# Altium PCB Weapon_of_Aphelios.PcbDoc
Units mil, origin at the board's own origin, x right, y up, seen from the top; angles counter-clockwise.
Board outline 1771.65 x 1968.5 mil, 2 copper layers (Top Layer, Bottom Layer); 49 components, 28 nets, 186 pads, 53 vias.
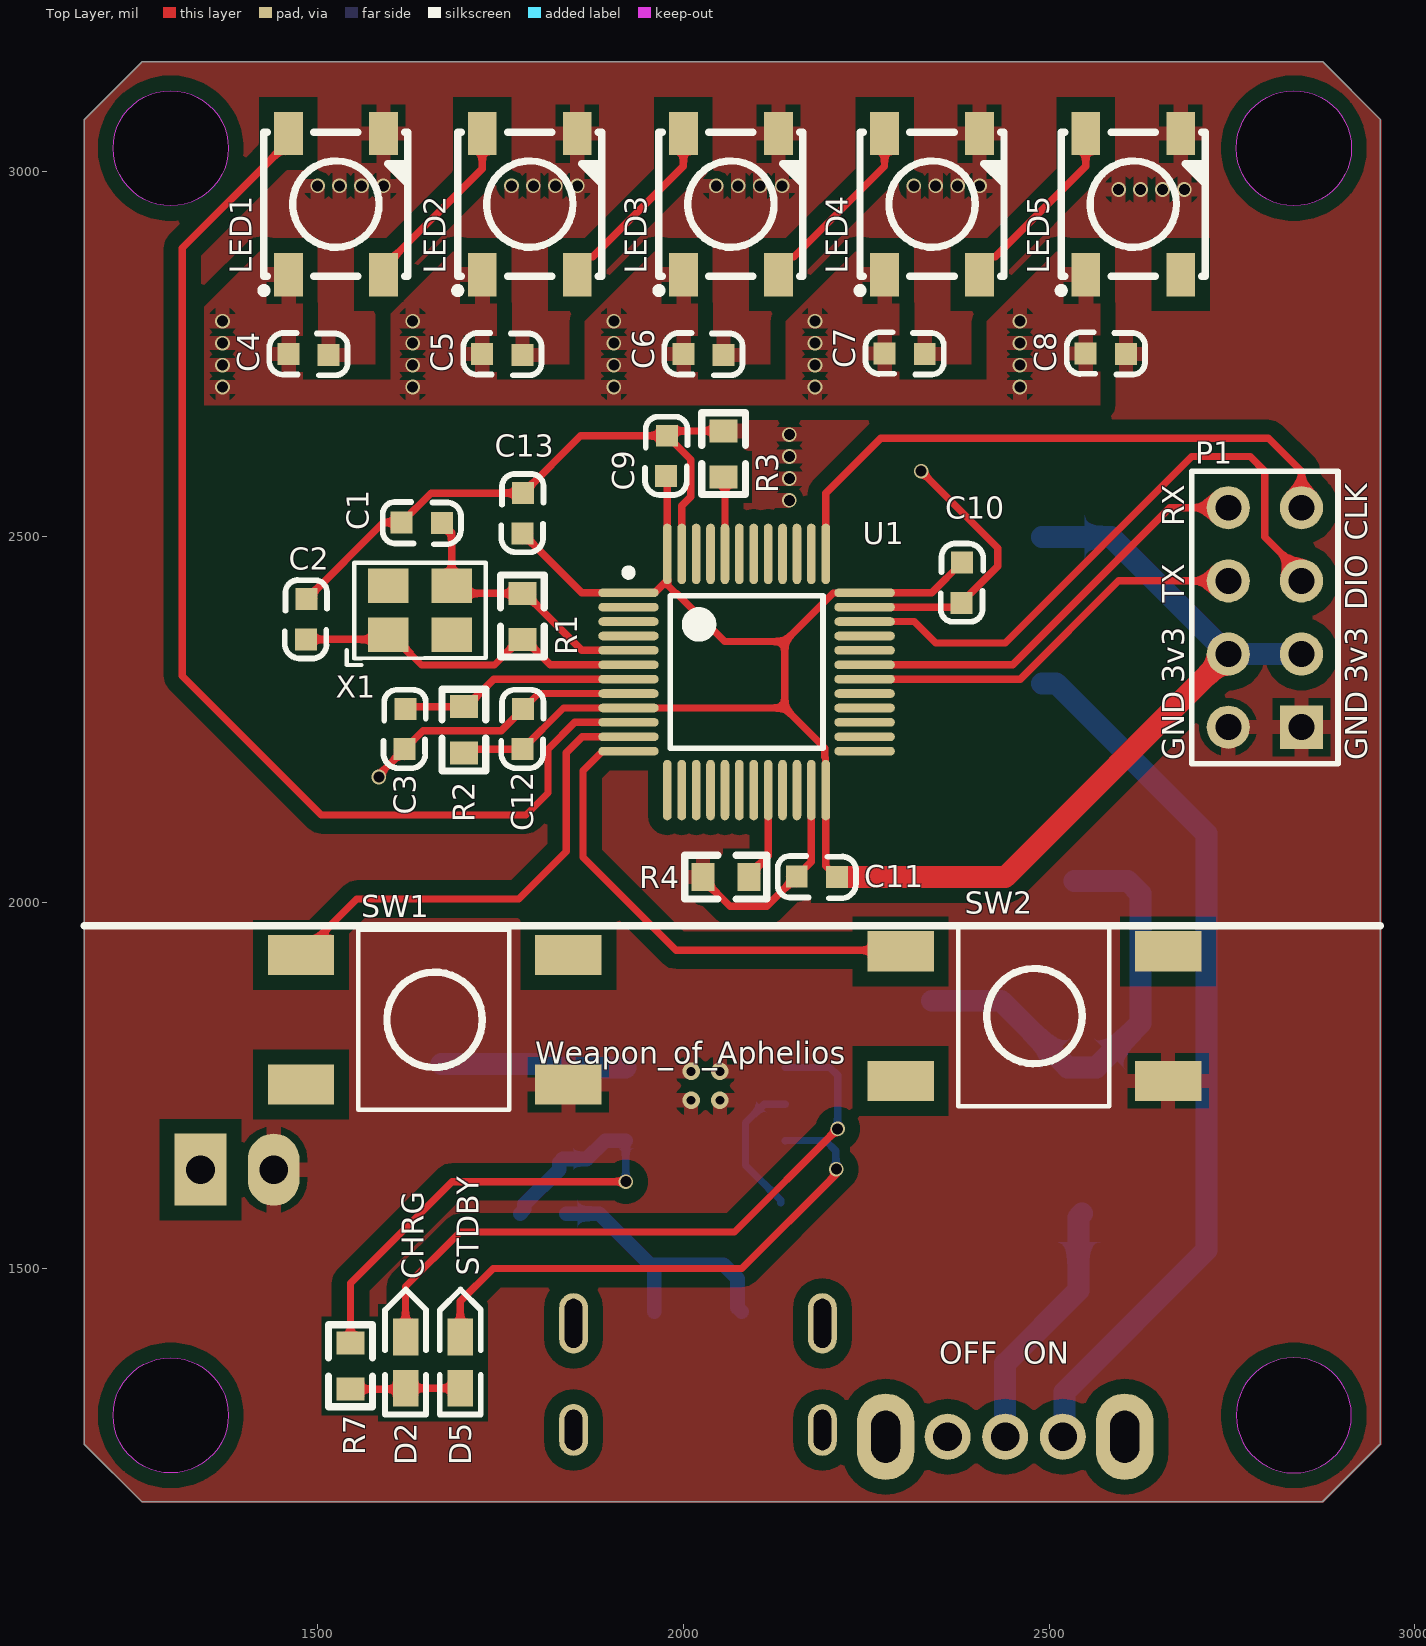
[diagram p0: Top Layer view]
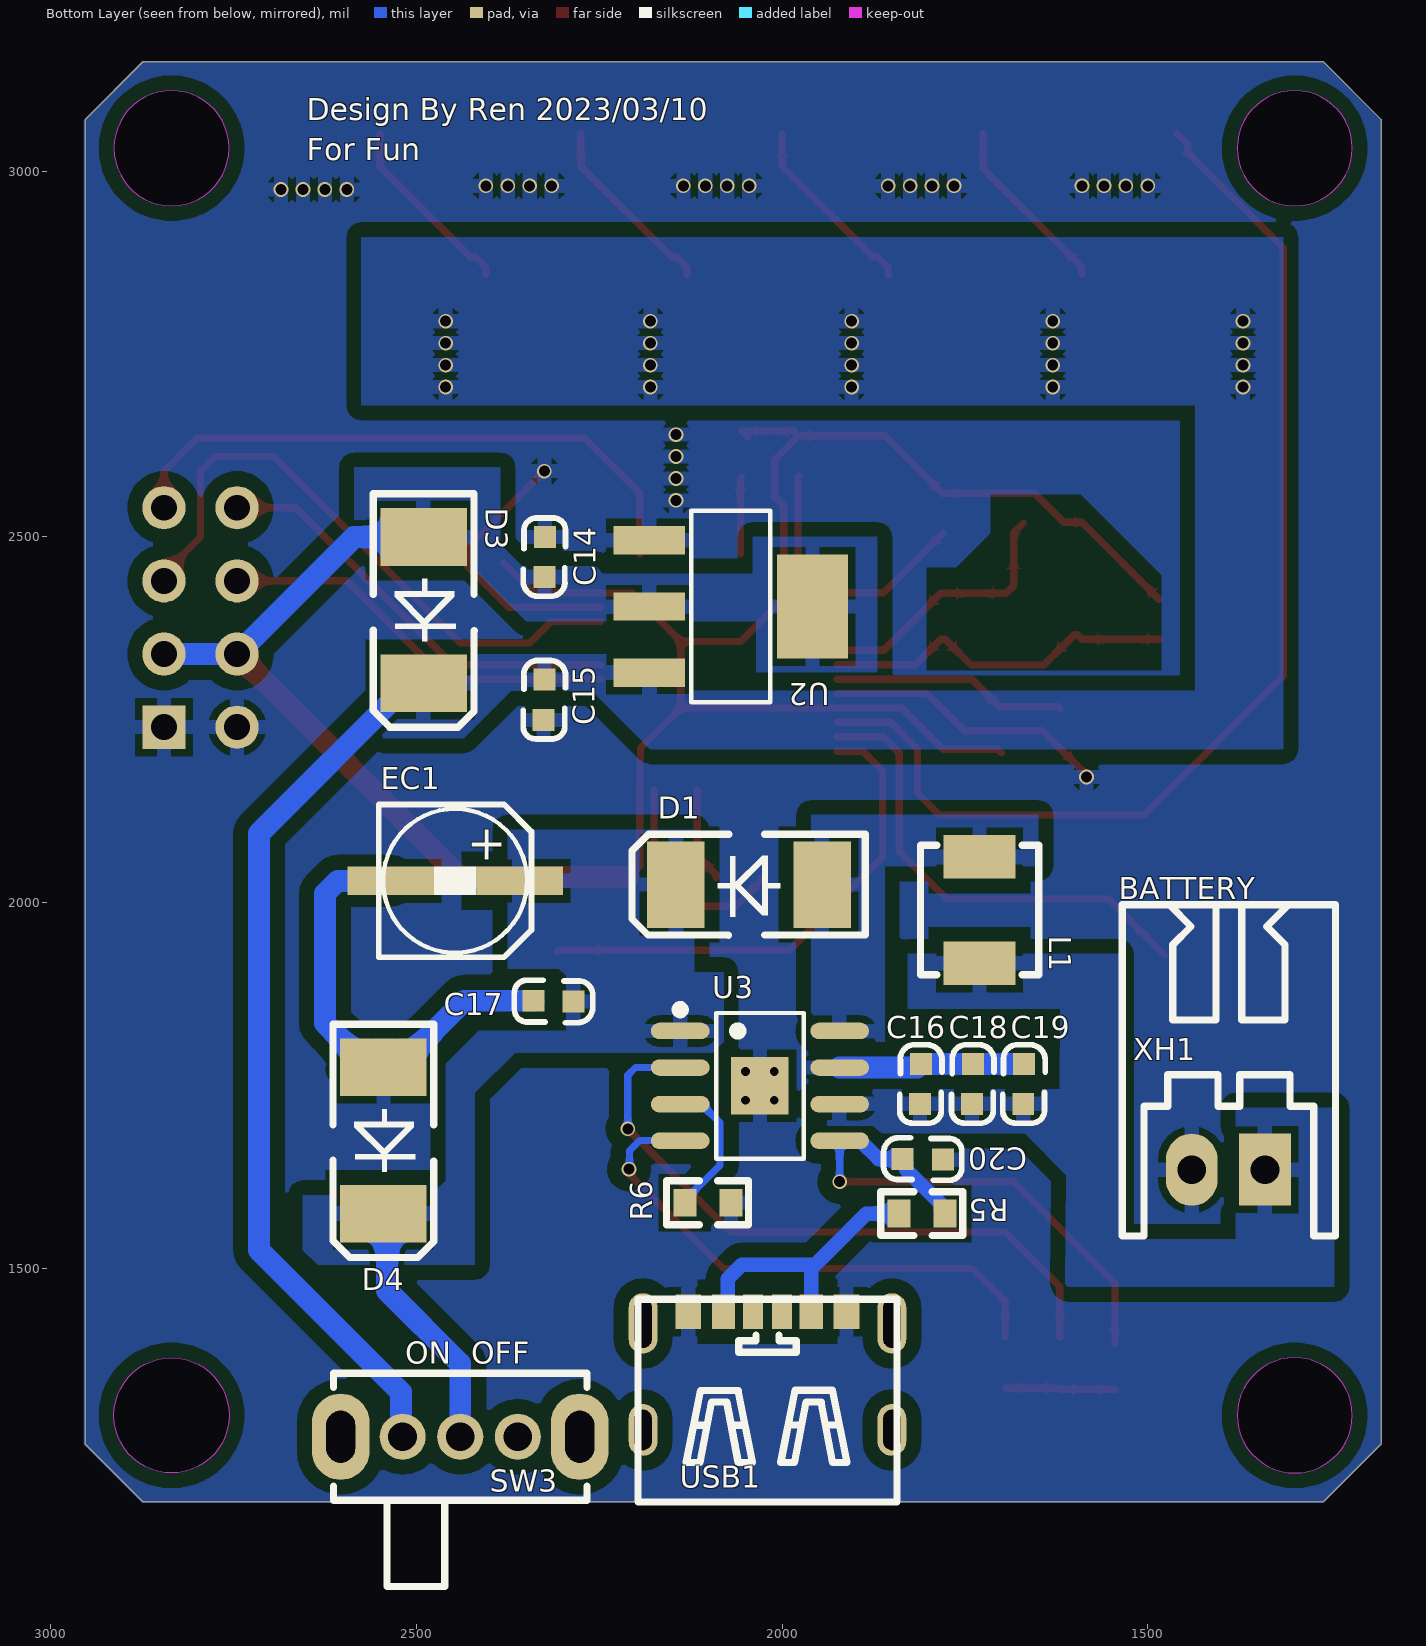
[diagram p1: Bottom Layer view, seen from below]
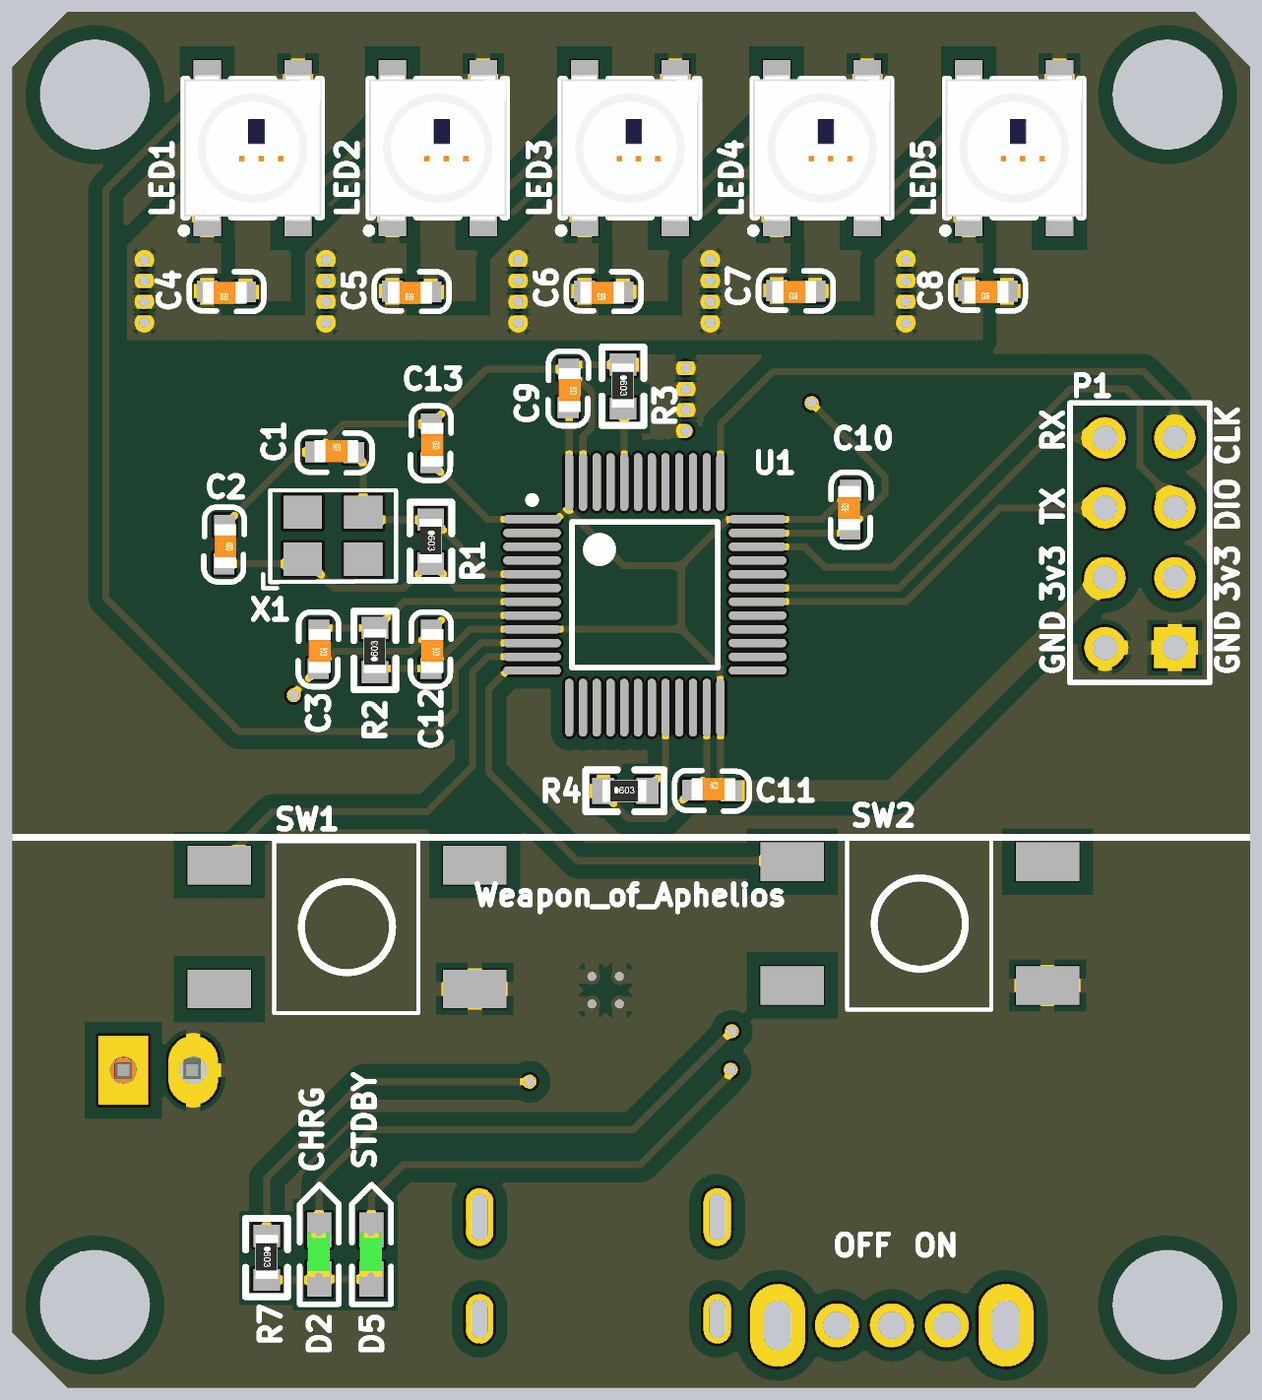
[diagram p2: 3D render of the assembled board from above, using the file's embedded part models]
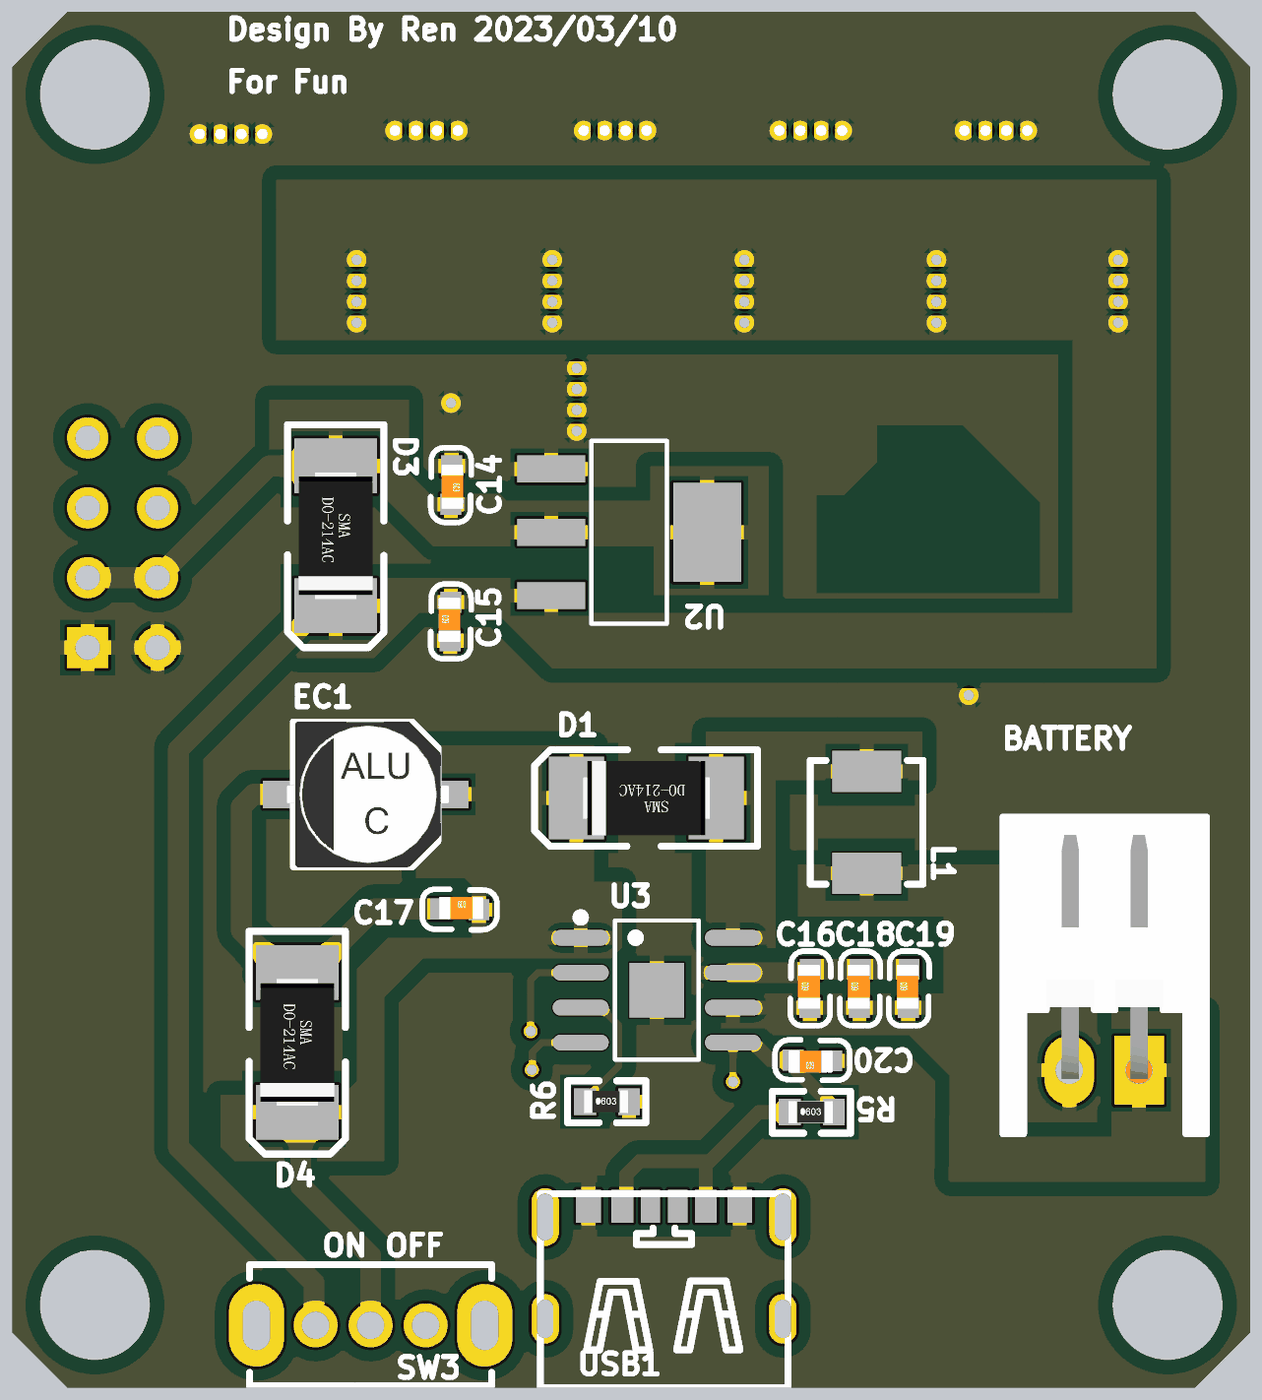
[diagram p3: 3D render of the assembled board from below, using the file's embedded part models]

## Layer stack, top to bottom
Top Solder: solder mask 0.4, Solder Resist, Dk 3.5
Top Layer: signal copper 1.4
Dielectric 1: dielectric 12.6, FR-4, Dk 4.8
Bottom Layer: signal copper 1.4
Bottom Solder: solder mask 0.4, Solder Resist, Dk 3.5

## Board outline
1259.84,1181.1 1181.1,1259.84 1181.1,3070.87 1259.84,3149.61 2874.02,3149.61 2952.76,3070.87 2952.76,1259.84 2874.02,1181.1
cut-out: 1299.21,1220.47 cw(c1299.21,1299.21) 1220.47,1299.21 cw(c1299.21,1299.21) 1299.21,1377.95 cw(c1299.21,1299.21) 1377.95,1299.21 cw(c1299.21,1299.21)
cut-out: 2755.91,1299.21 ccw(c2834.65,1299.21) 2834.65,1220.47 ccw(c2834.65,1299.21) 2913.39,1299.21 ccw(c2834.65,1299.21) 2834.65,1377.95 ccw(c2834.65,1299.21)
cut-out: 2834.65,2952.76 cw(c2834.65,3031.5) 2755.91,3031.5 cw(c2834.65,3031.5) 2834.65,3110.24 cw(c2834.65,3031.5) 2913.39,3031.5 cw(c2834.65,3031.5)
cut-out: 1299.21,2952.76 cw(c1299.21,3031.5) 1220.47,3031.5 cw(c1299.21,3031.5) 1299.21,3110.24 cw(c1299.21,3031.5) 1377.95,3031.5 cw(c1299.21,3031.5)

## Design rules (kind name [scope] priority, off if disabled: settings)
Clearance MCU [InComponent('U1') vs InComponent('U1')] p1: gap=8 ignorepadtopadclearanceinfootprint=TRUE except(0: Arc-Hole Track-Hole SMDPad-Hole THPad-Hole Via-Hole Fill-Hole Poly-Hole Region-Hole Text-Hole)
Clearance [All] p2: gap=8 ignorepadtopadclearanceinfootprint=TRUE except(0: Arc-Hole Track-Hole SMDPad-Hole THPad-Hole Via-Hole Fill-Hole Poly-Hole Region-Hole Text-Hole)
PlaneConnect [All] p1: planeconnectstyle=Relief reliefexpansion=20 reliefentries=4 reliefconductorwidth=20 reliefairgap=10
PolygonConnect [All] p1: connectstyle=Relief reliefconductorwidth=20 reliefentries=4 polygonreliefangle="90 Angle" airgapwidth=10
RoutingVias [All] p1: holewidth=15 width=20 viastyle="Through Hole" minholewidth=15 minwidth=20 maxholewidth=30 maxwidth=40
SolderMaskExpansion [All] p1: expansion=4 istentingtop=FALSE
Width [All] p1: maxlimit=30 minlimit=10 preferedwidth=20
29 further rules are at their usual default settings.

## Components (designator, comment, footprint, x,y, rotation, side; value= is the part's Value field where it differs from the comment)
C1 "22pF" 0603C 1614.79,2520.35 r0 top
C2 "22pF" 0603C 1485.35,2415.21 r270 top
C3 "100nF" 0603C 1620.35,2265.21 r270 top
C4 "100nF" 0603C 1515.21,2748.65 r180 top
C5 "100nF" 0603C 1780.21,2748.65 r180 top
C6 "100nF" 0603C 2055.21,2748.65 r180 top
C7 "100nF" 0603C 2330.21,2749.65 r180 top
C8 "100nF" 0603C 2605.21,2749.65 r180 top
C9 "100nF" 0603C 1977.93,2638.64 r270 top
C10 "100nF" 0603C 2379.65,2409.79 r90 top
C11 "100nF" 0603C 2154.79,2036.35 r0 top
C12 "100nF" 0603C 1781.35,2265.21 r270 top
C13 "100nF" 0603C 1781.35,2560.21 r270 top
C14 "10uF" 0603C 2323.65,2500.21 r270 bottom
C15 "10uF" 0603C 2326.35,2249.79 r90 bottom
C16 "0.1uF" 0603C 1811.65,1724.49 r90 bottom
C17 "100nF" 0603C 2340.21,1866.35 r180 bottom
C18 "22uF" 0603C 1740.65,1724.49 r90 bottom
C19 "22uF" 0603C 1670.65,1724.49 r90 bottom
C20 "10uF" 0603C 1780.09,1648.35 r0 bottom
D1 "SS34-MS" SMA/DO-214AC 1950.3,2024.7 r0 bottom
D2 "CHRG" LED-0603B 1620.56,1336.3 r90 top
D3 "SS34-MS" SMA/DO-214AC 2490,2495 r270 bottom
D4 "SMAJ6.0A" SMA/DO-214AC 2545,1770 r270 bottom
D5 "STDBY" LED-0603B 1695.3,1336.3 r90 top
EC1 "47uF" SMD-EC5.0X5.3X5.4 2358.75,2030 r0 bottom
L1 "10uH" IND-SMD_L4.5-W4.1_TMPA0402SP 1730,1990 r270 bottom
LED1 "WS2812B-B" LED-SMD_4P-L5.0-W5.0-TL_WS2812B-B 1525,2955 r90 top
LED2 "WS2812B-B" LED-SMD_4P-L5.0-W5.0-TL_WS2812B-B 1790,2955 r90 top
LED3 "WS2812B-B" LED-SMD_4P-L5.0-W5.0-TL_WS2812B-B 2065,2955 r90 top
LED4 "WS2812B-B" LED-SMD_4P-L5.0-W5.0-TL_WS2812B-B 2340,2955 r90 top
LED5 "WS2812B-B" LED-SMD_4P-L5.0-W5.0-TL_WS2812B-B 2615,2955 r90 top
P1 "Header 4X2" HDR2X4 2845,2240 r90 top
R1 "1M" 0603R 1780,2422.99 r270 top
R2 "10K" 0603R 1700,2205 r90 top
R3 "10K" 0603R 2055,2645 r270 top
R4 "10K" 0603R 2027.01,2035 r0 top
R5 "0.3" 0603R 1840,1575 r180 bottom
R6 "3k" 0603R 2132.99,1590 r180 bottom
R7 "1K" 0603R 1545,1397.99 r270 top
SW1 "TL3301EF100QG" KEY-SMD_4P-L6.0-W6.0-P4.50-LS10.0 1660,1840 r270 top
SW2 "TL3301EF100QG" KEY-SMD_4P-L6.0-W6.0-P4.50-LS10.0 2480,1845 r270 top
SW3 "SK12D07VG3_C431547" SW-TH_SK12D07VG3 2440,1270 r180 bottom
U1 "STM32F103C" LQFP-48_M 2086.42,2315.47 r0 top
U2 "AMS1117-3.3_C369933" SOT-223-4_L6.5-W3.5-P2.30-LS7.0-BR 2070,2405 r0 bottom
U3 "TP5400" SOIC-8_L5.0-W4.0-P1.27-LS6.0-BL-EP2.0 2030.3,1749.7 r270 bottom
USB1 "TYPE-C-31-M-16" TYPE-C-31-M-16 2020,1360 r180 bottom
X1 "8MHz" OSC-SMD_4P-L3.2-W2.5-BL 1640,2400 r0 top
XH1 "XH2" XH2/2.54mm/90 1340,1635 r0 bottom

## Footprints (in the part's own frame and the unit in brackets; to place one, negate y for a bottom-side part, rotate by r counter-clockwise, add the part's x,y. Pads: shape width x height; smd on the part's side, far side on the other; paste and mask are expansions set on the pad)
0603C [mil]
  rect 30x30 smd: 1(0.21,-0.35) 2(55.21,-1.35)
  silkscreen extent -26,-30 81,28, body extent -1,-15 62,17, height 12
0603R [mm]
  rect 0.8x0.965 smd: 1(0,0) 2(1.6,0)
  silkscreen extent -0.64,-0.76 2.21,0.76, body extent -0.04,-0.41 1.56,0.41, height 0.45
HDR2X4 [mm] "Connector; Header; 4x2 Position"
  rect 1.5x1.5 hole 0.9: 1(0,0)
  round 1.5 hole 0.9: 2(0,2.54) 3(2.54,0) 4(2.54,2.54) 5(5.08,0) 6(5.08,2.54) 7(7.62,0) 8(7.62,2.54)
  silkscreen extent -1.27,-1.27 8.89,3.81
IND-SMD_L4.5-W4.1_TMPA0402SP [mm]
  rect 1.5x2.5 smd mask+0.051: 1(-1.85,0) 2(1.85,0)
  silkscreen extent -2.25,-2.05 2.25,2.05
KEY-SMD_4P-L6.0-W6.0-P4.50-LS10.0 [mm]
  rect 1.4x2.3 smd mask+0.051: 1(-2.25,-4.643) 2(-2.25,4.643) 3(2.25,4.643) 4(2.25,-4.643)
  silkscreen extent -3.13,-2.65 3.13,2.6
LED-0603B [mil]
  rect 50x35 smd: A(0,0.26) K(70,0.26)
  silkscreen extent -36,-28 135,28, body extent 4,-15 66,17, height 24
LED-SMD_4P-L5.0-W5.0-TL_WS2812B-B [mm]
  rect 1.5x1 smd mask+0.051: 1(-2.45,1.65) 2(-2.45,-1.65) 3(2.45,-1.65) 4(2.45,1.65)
  silkscreen extent -3.1,-2.5 2.5,2.6, body extent -2.7,-2.5 2.7,2.5, height 1.57
LQFP-48_M [mm] "Thin QFP, 48-Leads, Body 7x7mm, Pitch 0.5mm, IPC Low Density"
  oval 2.1x0.3 smd: 1(-4.1,2.75) 2(-4.1,2.25) 3(-4.1,1.75) 4(-4.1,1.25) 5(-4.1,0.75) 6(-4.1,0.25) 7(-4.1,-0.25) 8(-4.1,-0.75) 9(-4.1,-1.25) 10(-4.1,-1.75) 11(-4.1,-2.25) 12(-4.1,-2.75) 25(4.1,-2.75) 26(4.1,-2.25) 27(4.1,-1.75) 28(4.1,-1.25) 29(4.1,-0.75) 30(4.1,-0.25) 31(4.1,0.25) 32(4.1,0.75) 33(4.1,1.25) 34(4.1,1.75) 35(4.1,2.25) 36(4.1,2.75)
  oval 0.3x2.1 smd: 13(-2.75,-4.1) 14(-2.25,-4.1) 15(-1.75,-4.1) 16(-1.25,-4.1) 17(-0.75,-4.1) 18(-0.25,-4.1) 19(0.25,-4.1) 20(0.75,-4.1) 21(1.25,-4.1) 22(1.75,-4.1) 23(2.25,-4.1) 24(2.75,-4.1) 37(2.75,4.1) 38(2.25,4.1) 39(1.75,4.1) 40(1.25,4.1) 41(0.75,4.1) 42(0.25,4.1) 43(-0.25,4.1) 44(-0.75,4.1) 45(-1.25,4.1) 46(-1.75,4.1) 47(-2.25,4.1) 48(-2.75,4.1)
  silkscreen extent -4.22,-2.65 2.65,3.57, body extent -3.5,-3.5 3.5,3.5, height 1.6
OSC-SMD_4P-L3.2-W2.5-BL [mm]
  rect 1.4x1.2 smd: 1(-1.1,-0.851) 2(1.1,-0.851) 3(1.1,0.851) 4(-1.1,0.851)
  silkscreen extent -2.54,-1.91 2.29,1.65
SMA/DO-214AC [mm] "塑封二极管"
  rect 2x3 smd: A(-0.127,0) K(4.953,0)
  silkscreen extent -1.63,-1.75 6.48,1.75, body extent 0.11,-1.35 4.71,1.35, height 2.4
SMD-EC5.0X5.3X5.4 [mm]
  rect 3x1 smd: 1(0,0) 2(4.477,0)
  silkscreen extent -0.41,-2.65 4.89,2.66, body extent -0.79,-2.65 5.11,2.65, height 5.41
SOIC-8_L5.0-W4.0-P1.27-LS6.0-BL-EP2.0 [mil]
  oval 22.6x80.2 smd mask+2: 1(-75,-109) 2(-25,-109) 3(25,-109) 4(75,-109) 5(75,109) 6(25,109) 7(-25,109) 8(-75,109)
  rect 78.7x78.7 smd mask+2: 9(0,0)
  silkscreen extent -110,-115 100,60
SOT-223-4_L6.5-W3.5-P2.30-LS7.0-BR [mm]
  rect 2.47x0.98 smd: 1(2.835,-2.3) 2(2.835,0) 3(2.835,2.3)
  rect 2.47x3.6 smd: 4(-2.835,0)
  silkscreen extent -1.37,-3.33 1.37,3.33
SW-TH_SK12D07VG3 [mm]
  round 1.6 hole 1: 1(-2,0) 2(0,0) 3(2,0)
  oval 2x3 hole 1 slot 1.8 at 90 deg: 4(4.15,0) 5(-4.15,0)
  silkscreen extent -4.4,-5.2 4.4,2.2
TYPE-C-31-M-16 [mm]
  oval 1x2.1 hole 0.6 slot 1.7 at 90 deg: 1(-4.32,1.65) 2(4.32,1.65)
  oval 1x1.8 hole 0.6 slot 1.4 at 90 deg: 3(-4.32,-2.05) 4(4.32,-2.05)
  rect 0.7x1.2 smd: A5(-0.5,2.05) B5(0.5,2.05)
  rect 0.8x1.2 smd: A9(1.52,2.05) B9(-1.52,2.05)
  rect 0.9x1.2 smd: A12(2.75,2.05) B12(-2.75,2.05)
  silkscreen extent -4.5,-4.55 4.5,2.49
XH2/2.54mm/90 [mm]
  rect 1.8x2.5 hole 1: 1(0,0)
  oval 1.8x2.5 hole 1: 2(2.54,0)
  silkscreen extent -2.45,-9.2 4.95,2.3, body extent -2.45,-9.2 4.95,2.3, height 6.1

## Part data
C1 C2: library part CAP
C3 C4 C5 C6 C7 C8 C9 C10 C11 C12 C13 C14 C15 C16 C17 C18 C19 C20: library part CAP, "无极性电容"
D1 D3: library part "DIODE SCHOTTKY", "肖特基二极管"
D2 D5: library part LED
D4: library part "DIODE ZENER", "瞬态二极管 SMAJ6.0A DO-214AC 6.0V"
EC1: library part SMD_ECAP, "贴片电解电容"
L1: library part TMPC0402HP-100MG-Z02, DC Resistance (DCR)=215mΩ, JLCPCB Part Class="Extended Part", LCSC Part Name="10uH ±20% 1.4A 215mΩ", Manufacturer=台庆, Rated Current=1.4A, Tolerance=±20%, Add into BOM=yes, Convert to PCB=yes, Datasheet=https://atta.szlcsc.com/upload/public/pdf/source/20200917/C305203_F071C71654DE86DE842DF29DC4BB6A78.pdf, Device=TMPC0402HP-100MG-Z02, Manufacturer Part=TMPC0402HP-100MG-Z02, Name=10uH, Supplier=LCSC, Supplier Footprint=SMD, Supplier Part=C305203, Symbol=TMPC0402HP-100MG-Z02
LED1 LED2 LED3 LED4 LED5: Emitted Color=RGB三色, JLCPCB Part Class="Extended Part", LCSC Part Name="RGB三色 （注意防潮，请查阅规格书中对应具体内容）", Manufacturer=worldsemi, Add into BOM=yes, Convert to PCB=yes, Datasheet=https://atta.szlcsc.com/upload/public/pdf/source/20200615/C114586_26EB6813EC9F2A3F6C7FBB2AD75DE01F.pdf, Device=WS2812B-B, Manufacturer Part=WS2812B-B, Name=WS2812B-B, Supplier=LCSC, Supplier Footprint=5050(mm), Supplier Part=C114586, Symbol=WS2812B-B
P1: "Header, 4-Pin, Dual row", LatestRevisionDate=17-Jul-2002, LatestRevisionNote="Re-released for DXP Platform.", Publisher="Altium Limited"
R1 R2 R3 R4 R5 R6 R7: library part RES
SW1 SW2: Contact Current=50mA, JLCPCB Part Class="Extended Part", Manufacturer=E-Switch, Voltage Rating (DC)=12V, Actuator Style=圆形按钮, Add into BOM=yes, Circuit=单刀单掷, Convert to PCB=yes, Datasheet=https://atta.szlcsc.com/upload/public/pdf/source/20181030/C273499_C7AAC60B73C66F9CC8848B3DA9BBFF04.pdf, Device=TL3301EF100QG, LCSC Part Name=TL3301EF100QG, Manufacturer Part=TL3301EF100QG, Mounting Style=立贴, Name=TL3301EF100QG, Supplier=LCSC, Supplier Footprint=SMD,6x6mm, Supplier Part=C273499, Switch Height=3.7mm, Switch Length=6mm, Switch Width=6mm, Symbol=TL3301EF100QG, With Lamp=-
SW3: BOM_JLCPCB Part Class="Extended Part", BOM_Manufacturer="SHOU HAN", BOM_Manufacturer Part=SK12D07VG3, BOM_Supplier=LCSC, BOM_Supplier Part=C431547, Contributor=LCSC, spicePre=S, spiceSymbolName=SK12D07VG3_C431547
U1: "STM32单片机48引脚"
U2: BOM_Manufacturer=KEXIN, BOM_Manufacturer Part=AMS1117-3.3, BOM_Assembly Type=smtWeld, BOM_Paste Type=expand, BOM_Supplier=LCSC, BOM_Supplier Part=C369933, Contributor=LCSC, spicePre=U, spiceSymbolName=AMS1117-3.3_C369933
U3: Battery Pack Voltage=-, JLCPCB Part Class="Extended Part", Manufacturer=TOPPOWER(南京拓微), Add into BOM=yes, Battery Chemistry=-, Charge Current - Max=-, Convert to PCB=yes, Datasheet=https://atta.szlcsc.com/upload/public/pdf/source/20131206/1457706662490.pdf, Device=TP5400, Interface=-, LCSC Part Name=TP5400, Manufacturer Part=TP5400, Name=TP5400, Number of Cells=-, Supplier=LCSC, Supplier Footprint=SOIC-8_EP_150mil, Supplier Part=C24154, Symbol=TP5400, Voltage - Supply (Max)=-
X1: library part "8MHz 10pF ±10ppm", BOM_Manufacturer="Zhejiang Abel Elec", BOM_Manufacturer Part=TAXM8M4RDBCCT2T, BOM_Assembly Type=smtWeld, BOM_Paste Type=expand, BOM_Supplier=LCSC, BOM_Supplier Part=C400090, Contributor=LCSC, nameAlias=Frequency, spicePre=X, spiceSymbolName=TAXM8M4RDBCCT2T

## Via types
v1: diameter 20, hole 15, Top Layer to Bottom Layer, 49 vias
v2: diameter 24, hole 12, Top Layer to Bottom Layer, 4 vias

## Nets (pads, with @x,y where several pads share a name; then routed paths per layer and width w, separated by ;. In a path a pad name is that pad's centre, name@x,y a point inside that pad or via, vN(x,y) a via of type N, cw(c..) or ccw(c..) an arc to the next point about the centre after c; other vN are vias at no path point)
3v3: C9.2 C10.2 C11.2 C12.2 C13.2 C14.2 D3.A P1.3 P1.4 R2.1 U1.1 U1.9 U1.24 U1.36 U1.48 U2.2 U2.4 | length 2766.3
  Top Layer w10: R2.1 1705,2210 C12.2 1836.26,2266.26 U1.9 2138.74,2266.26 ; C13.2 1861.26,2423.74 U1.1 1960.78,2423.74 1978.5,2441.46 1978.5,2434.06 ; C9.2 1978.15,2581.85 U1.48 U1.48@1978.15,2441.46 ; 1978.93,2433.63 1990,2422.55 1991.23,2422.55 2056.65,2357.13 2138.74,2357.13 ; C11.2 2194.68,2050.32 U1.24 2194.34,2154.4 2194.34,2198.53 2193.5,2199.37 2193.5,2211.5 2138.74,2266.26 ; C10.2 2339.74,2423.74 U1.36 2247.49,2423.39 2205,2423.39 2138.74,2357.13 ; 2138.74,2266.26 2138.74,2357.13
  Top Layer w30: C11.2 2440,2035 P1.4
  Bottom Layer w30: D3.A 2585,2500 P1.4 P1.3
5V: C4.2 C5.2 C6.2 C7.2 C8.2 C15.2 D3.K LED1.1 LED2.1 LED3.1 LED4.1 LED5.1 SW3.1 U2.3 | length 1216
  Bottom Layer w30: D3.K 2509.68,2300 2715,2094.68 2715,1525 2520.96,1330.96 2520.96,1272.22 SW3.1
  other v1: 1370,2705 1630,2705 1905,2705 2180,2705 2460,2705 1370,2735 1630,2735 1905,2735 2180,2735 2460,2735 1370,2765 1630,2765 1905,2765 2180,2765 2460,2765 1370,2795 1630,2795 1905,2795 2180,2795 2460,2795
BAT: C16.1 C18.1 C19.1 L1.2 U3.6 XH1.1
DIN: LED1.4 U1.10 | length 1577.8
  Top Layer w10: LED1.4 1445.36,3036.77 1445.36,3025.36 1315,2895 1315,2310 1505,2120 1785,2120 1815,2150 1815,2210 1851.57,2246.57 U1.10
GND: C1.1 C2.1 C3.2 C4.1 C5.1 C6.1 C7.1 C8.1 C9.1 C10.1 C11.1 C12.1 C13.1 C14.1 C15.1 C16.2 C17.1 C18.2 C19.2 C20.1 D4.A EC1.2 LED1.3 LED2.3 LED3.3 LED4.3 LED5.3 P1.1 P1.2 R3.1 R4.1 R6.2 SW1.3 SW2.3 U1.8 U1.23 U1.35 U1.47 U2.1 U3.7 U3.9 USB1.A12 USB1.B12 XH1.2 | length 2791.5
  Top Layer w10: C2.1 1590,2520 C1.1 1655,2560 C13.1 1859.43,2638.43 C9.1 ; v1(1583.83,2171.83) 1585.74,2173.74 1585.74,2176.74 C3.2 1644,2235 1751,2235 C12.1 1801.94,2285.94 U1.8 ; U1.47 1997.83,2542.83 2010,2555 2010,2606 C9.1 ; R4.1 2027.01,2031.75 2063.76,1995 2114,1995 C11.1 2175,2056 U1.23 ; R3.1@2047.01,2637.01 R3.1 1984.15,2645 C9.1 ; U1.35 2374.06,2404.06 C10.1 2430,2460 2430,2485 v1(2325,2590)
  Bottom Layer w30: C19.2 C18.2 C16.2 1815.3,1774.7 U3.7 ; C17.1 2434.32,1866 2525.32,1775 D4.A 2564.68,1775 2625,1835.32 2625,2012.43 2607.43,2030 EC1.2
  other v1: 2145,2550 2145,2580 2145,2610 2145,2640 2595,2975 2625,2975 2655,2975 2685,2975 1500,2980 1530,2980 1560,2980 1590,2980 1765,2980 1795,2980 1825,2980 1855,2980 2045,2980 2075,2980 2105,2980 2135,2980 2315,2980 2345,2980 2375,2980 2405,2980
  other v2: 2010.6,1730 2050,1730 2010.6,1769.4 2050,1769.4
KEY1: SW1.1 U1.11 | length 650.4
  Top Layer w10: SW1.1 1553.62,2005 1775,2005 1840,2070 1840,2205 1861.89,2226.89 U1.11
KEY2: SW2.1 U1.12 | length 689.2
  Top Layer w10: U1.12 1889.57,2207.2 1862.82,2180.46 1862.82,2062.18 1990,1935 2305.78,1935 SW2.1@2307.2,1933.58
NetC1_2: C1.2 R1.1 U1.5 X1.3 | length 369.4
  Top Layer w10: C1.2 1683.3,2505.7 X1.3 1693.82,2422.99 R1.1 1783.25,2422.99 1861.24,2345 U1.5
NetC2_2: C2.2 R1.2 U1.6 X1.1 | length 489.7
  Top Layer w10: C2.2 1590.19,2360 X1.1 1600.63,2366.5 1642.13,2325 1741.75,2325 1776.75,2360 R1.2 1783.25,2360 1817.93,2325.32 U1.6
NetC3_1: C3.1 R2.2 U1.7 | length 321.8
  Top Layer w10: C3.1 1622.99,2267.99 R2.2 1703.25,2267.99 1740.89,2305.63 U1.7
NetC20_2: C20.2 R5.2 R7.1 U3.5 | length 767
  Top Layer w10: R7.1 1545,1480 1683.7,1618.7 v1(1921.3,1618.7)
  Bottom Layer w10: v1(1921.3,1618.7) U3.5
  Bottom Layer w20: R5.2 1782.76,1580.75 1782.76,1587.76 1830.3,1635.3 1830.3,1644.7 C20.2 1868.2,1649.7 1892,1673.5 1893.2,1674.7 U3.5
NetD1_A: D1.A L1.1 U3.8
NetD2_A: D2.A D5.A R7.2 | length 150.6
  Top Layer w10: R7.2 1619,1335 D2.A D5.A
NetD2_K: D2.K U3.2 | length 898.1
  Top Layer w10: D2.K 1620.3,1475.3 1695,1550 2070,1550 v1(2210.89,1690.89)
  Bottom Layer w10: U3.2 2200.3,1774.7 2210.89,1764.11 v1(2210.89,1690.89)
NetD5_K: D5.K U3.4 | length 742
  Top Layer w10: D5.K 1695.04,1455.04 1740,1500 2080,1500 2206.29,1626.29 2206.29,1630.08 2209.25,1633.04 v1(2209.25,1635.75)
  Bottom Layer w10: U3.4 2139.45,1674.85 2194.4,1674.85 2208.5,1660.75 2208.5,1636.5 v1(2209.25,1635.75)
NetLED1_2: LED1.2 LED2.4 | length 248.9
  Top Layer w10: LED1.2 LED1.2 1589.96,2868.39 1725.04,3003.47 LED2.4
NetLED2_2: LED2.2 LED3.4 | length 256.9
  Top Layer w10: LED2.2 LED2.2 1854.96,2868.39 1869.64,2883.07 1876.18,2883.07 2000.04,3006.93 LED3.4
NetLED3_2: LED3.2 LED4.4 | length 256.9
  Top Layer w10: LED3.2 LED3.2 2129.96,2868.39 2144.64,2883.07 2151.18,2883.07 2275.04,3006.93 LED4.4
NetLED4_2: LED4.2 LED5.4 | length 256.8
  Top Layer w10: LED4.2 2404.96,2868.39 2419.64,2883.07 2426.18,2883.07 2550.04,3006.93 LED5.4
NetR3_2: R3.2 U1.44 | length 105.9
  Top Layer w10: R3.2 2056.89,2580.12 U1.44
NetR4_2: R4.2 U1.20 | length 129.8
  Top Layer w10: R4.2 2090,2038.25 2115.94,2064.19 U1.20
NetR6_1: R6.1 U3.3 | length 193.9
  Bottom Layer w10: R6.1 2132.99,1593.25 2085,1641.24 2085,1699.2 2110.5,1724.7 U3.3
SWCLK: P1.7 U1.37 | length 832.9
  Top Layer w10: U1.37 2194.68,2559.68 2270,2635 2800,2635 2845,2590 P1.7
SWDIO: P1.5 U1.34 | length 844
  Top Layer w10: U1.34 2315.63,2384.37 2345,2355 2440,2355 2695,2610 2775,2610 2795,2590 2795,2500 2845,2450 P1.5
USART1_RX: P1.8 U1.31 | length 586.1
  Top Layer w10: U1.31 2450.32,2325.32 2665,2540 P1.8
USART1_TX: P1.6 U1.30 | length 552.8
  Top Layer w10: U1.30 2460.63,2305.63 2595,2440 P1.6
VCC: R5.1 USB1.A9 USB1.B9 | length 385
  Bottom Layer w20: R5.1 1885,1575 1955,1505 ; USB1.A9 1960.15,1499.85 1955,1505 ; USB1.B9 2074.1,1446.46 2074.1,1485.9 2055,1505 1955,1505
VOUT: C17.2 D1.K D4.K EC1.1 SW3.2 U3.1 | length 340
  Bottom Layer w30: SW3.2@2440,1278.54 2440,1370 2540,1470 2540,1570 D4.K
pads on no net: LED5.2 SW1.2 SW1.4 SW2.2 SW2.4 SW3.3 SW3.4 SW3.5 U1.2 U1.3 U1.4 U1.13 U1.14 U1.15 U1.16 U1.17 U1.18 U1.19 U1.21 U1.22 U1.25 U1.26 U1.27 U1.28 U1.29 U1.32 U1.33 U1.38 U1.39 U1.40 U1.41 U1.42 U1.43 U1.45 U1.46 USB1.1 USB1.2 USB1.3 USB1.4 USB1.A5 USB1.B5 X1.2 X1.4

## Polygon pours and split planes (outlines as drawn)
GND on Bottom Layer "GND_L02_P015" (solid, remove dead copper, pour order 15): 1260,3150 2875,3150 2955,3070 2955,1260 2875,1180 1260,1180 1180,1260 1180,3070
5V on Bottom Layer "5V_L02_P005" (solid, remove dead copper, pour order 5): 2585,2225 2435,2225 2370,2290 2260,2290 2180,2210 1315,2210 1315,2910 2575,2910 2575,2680 1435.44,2680 1435.44,2290 2130,2290 2130,2340 2585,2340
VOUT on Bottom Layer "VOUT_L02_P003" (solid, remove dead copper, pour order 3): 2375,2100 2120,2100 2120,1905 2080,1905 2080,1810 2095,1795 2365,1795 2420,1740 2420,1505 2635,1505 2655,1525 2655,1600 2480,1600 2460,1620 2460,1780 2415,1825 2295,1825 2295,1900 2305,1910 2375,1910
BAT on Bottom Layer "BAT_L02_P002" (solid, remove dead copper, pour order 2): 1380,1540 1380,1720 1245,1720 1245,1475 1612.72,1475 1611.24,1627.8 1668.44,1685 1863.44,1685 1875.94,1695 1938.44,1695 1938.44,1745 1620.16,1745 1619.84,1855 1828.44,1855 1828.44,1930 1540,1930 1540,1540
3v3 on Bottom Layer "3V3_L02_P004" (solid, remove dead copper, pour order 4): 2585,2595 2385,2595 2385,2490 2355,2460 2255,2460 2245,2450 2040,2450 2040,2500 1870,2500 1870,2315 2035,2315 2035,2385 2350,2385 2445,2480 2585,2480
NetD1_A on Bottom Layer "NETD1_A_L02_P006" (solid, remove dead copper, pour order 6): 1650,2050 1860,2050 1860,1810 1960,1810 1960,2120 1650,2120
GND on Top Layer "GND_L01_P016" (solid, remove dead copper, pour order 16): 1260,3150 2875,3150 2955,3070 2955,1260 2875,1180 1260,1180 1180,1260 1180,3070
5V on Top Layer "5V_L01_P013" (solid, remove dead copper, pour order 13): 2570,2680 2570,2890 2510,2890 2415,2795 2415,2715 2295,2715 2295,2890 2235,2890 2140,2795 2140,2715 2020,2715 2020,2890 1960,2890 1865,2795 1865,2715 1745,2715 1745,2890 1685,2890 1600,2805 1600,2715 1480,2715 1480,2890 1420,2890 1345,2815 1345,2680 1395,2680 1400,2680

## Other copper
Top Layer:
  pour cut-out: 1805,2460 1765,2460 1718,2507 1718,2560 1595,2560 1485,2450 1485,2320 1805,2320
Bottom Layer:
  pour cut-out: 1802,2458 1762,2458 1715,2505 1715,2558 1592,2558 1482,2448 1482,2318 1802,2318

## Silkscreen, mask and mechanical layers (free items; w line width, h text height)
Top Overlay:
  lines w10: 1181.1,1968.5 2952.76,1968.5
  text "RX" at 2685,2515 h30 r90
  text "CLK" at 2935,2495 h30 r90
  text "TX" at 2685,2410 h30 r90
  text "DIO" at 2935,2400 h30 r90
  text "3v3" at 2685,2300 h30 r90
  text "3v3" at 2935,2300 h30 r90
  text "GND" at 2685,2195 h30 r90
  text "GND" at 2935,2195 h30 r90
  text "Weapon_of_Aphelios" at 1797.58,1780 h30
  text "STDBY" at 1720,1490 h30 r90
  text "CHRG" at 1645,1485 h30 r90
  text "OFF" at 2350,1370 h30
  text "ON" at 2465,1370 h30
Bottom Overlay:
  text "Design By Ren 2023/03/10" at 2650,3070 h30
  text "For Fun" at 2650,3015 h30
  text "BATTERY" at 1540,2005 h30
  text "OFF" at 2425,1370 h30
  text "ON" at 2515,1370 h30
Mechanical 1:
  circle w10: c2834.65,3031.5 r78.74
  circle w10: c1299.21,3031.5 r78.74
  circle w10: c1299.21,1299.21 r78.74
  circle w10: c2834.65,1299.21 r78.74
  lines w10: 1259.84,3149.61 1181.1,3070.87 1181.1,1259.84 1259.84,1181.1 2874.02,1181.1 2952.76,1259.84 ; 1259.84,3149.61 1259.84,3149.61 ; 1259.84,3149.61 2874.02,3149.61 2952.76,3070.87 2952.76,1259.84 ; 2952.76,1259.84 2952.76,1259.84

## Text inside footprints (layer, text, board x,y; h text height)
EC1: Bottom Overlay "+" at 2376.26,2099.95 h47.24 r180